# EAGLE board x9c (EAGLE 9.6.2)
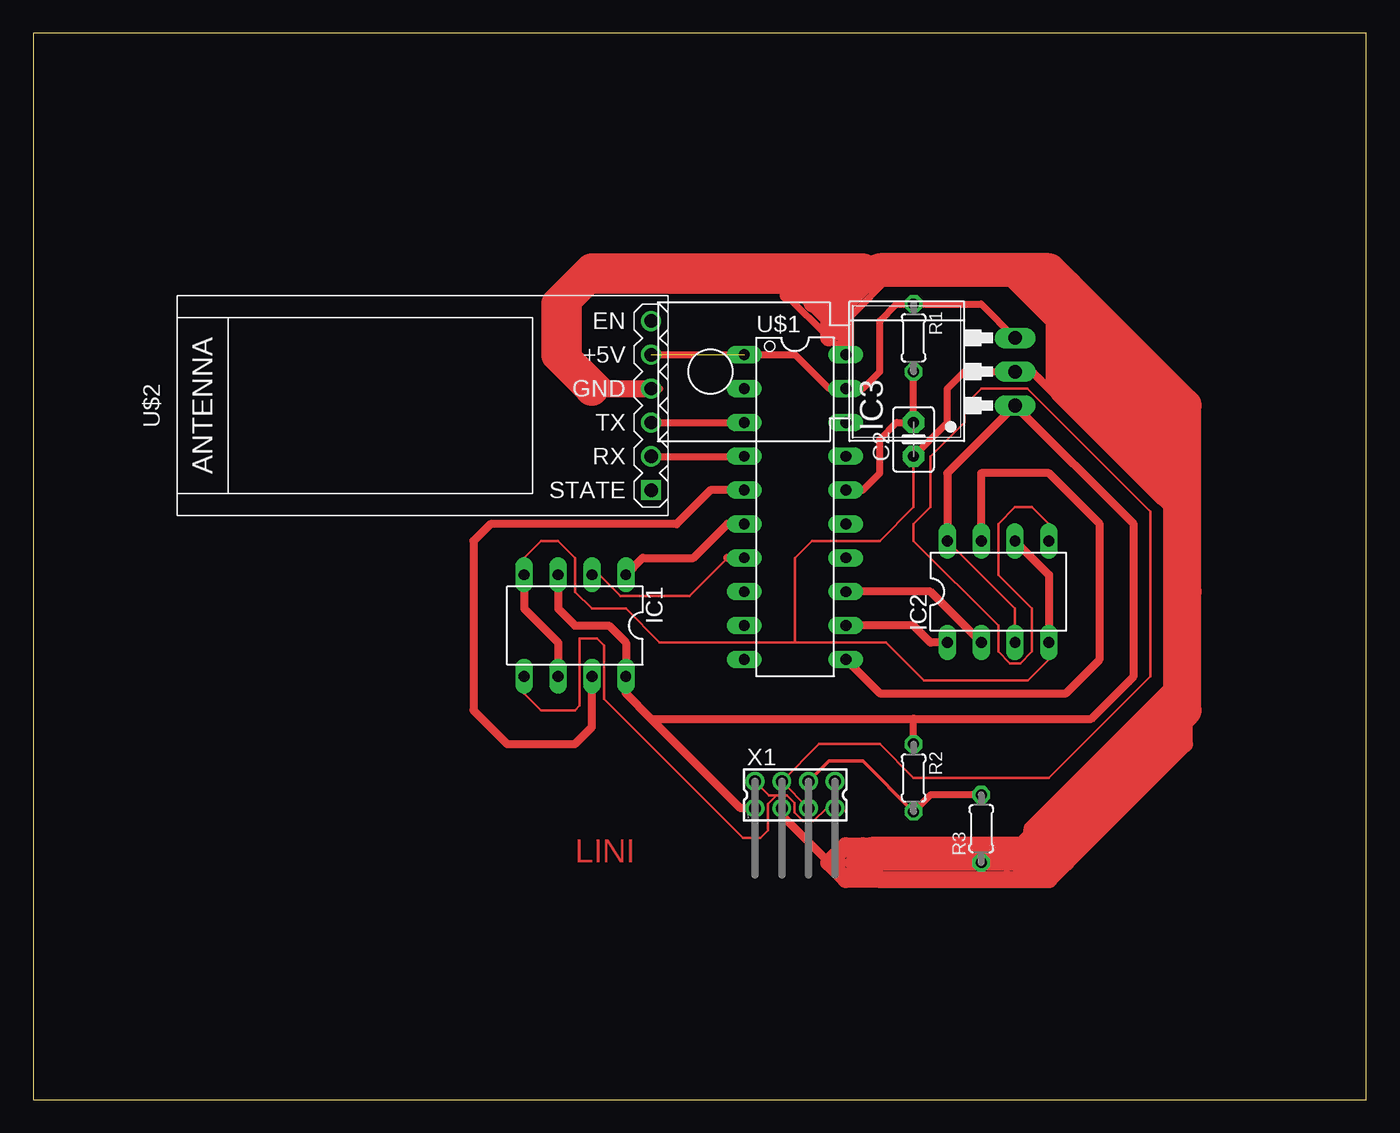
[diagram p0: board, top side]

Size 100 x 80 mm. Coordinates in mm from the lower left corner, seen from the top.
Outline: 0,0 100,0 100,80 0,80 0,0
Copper layers (1*16): Top 0.035mm / dielectric 1.5mm / Bottom 0.035mm
Design rules "default": minimum track width 6mil, minimum drill 0.35mm, track to track 6mil, track to pad 6mil, pad to pad 6mil, via to via 6mil, smd to smd 6mil, copper to edge 40mil, drill to drill 6mil, minimum pad ring 10mil, minimum via ring 8mil, stop-mask expansion 4mil, vias tented up to drill 0mil, thermal gap 10mil

## Footprints (pad centres in the part's own frame; a part is rotated, then mirrored left to right if it is on the bottom)
C2.5-3 = drill 0.813 pad 1.6 octagon: 1 -1.27,0; 2 1.27,0
DIL08 = drill 0.813 long: 1 -3.81,-3.81; 2 -1.27,-3.81; 3 1.27,-3.81; 4 3.81,-3.81; 5 3.81,3.81; 6 1.27,3.81; 7 -1.27,3.81; 8 -3.81,3.81
78MXXL = drill 1.016 long: GND 0,-5.08; IN -2.54,-5.08; OUT 2.54,-5.08 | hole 3.302: 0,17.78
0204/5 = drill 0.813 octagon: 1 -2.54,0; 2 2.54,0
N20 = drill 0.813 long: 1 -11.435,-3.81; 2 -8.895,-3.81; 3 -6.355,-3.81; 4 -3.815,-3.81; 5 -1.275,-3.81; 6 1.265,-3.81; 7 3.805,-3.81; 8 6.345,-3.81; 9 8.885,-3.81; 10 11.425,-3.81; 11 11.425,3.81; 12 8.885,3.81; 13 6.345,3.81; 14 3.805,3.81; 15 1.265,3.81; 16 -1.275,3.81; 17 -3.815,3.81; 18 -6.355,3.81; 19 -8.895,3.81; 20 -11.435,3.81
WIRELESS-BLUETOOTH-HC-05 = drill 1 square: 1 -6.35,-17.145 | drill 1: 2 -3.81,-17.145; 3 -1.27,-17.145; 4 1.27,-17.145; 5 3.81,-17.145; 6 6.35,-17.145
332-08 = drill 0.9 pad 1.27: 1 -3,-1; 2 -3,1; 3 -1,-1; 4 -1,1; 5 1,-1; 6 1,1; 7 3,-1; 8 3,1

## Placement (x,y rotation side)
C2  [C2.5-3]  66.04,49.53 90 top
IC1  X9C  [DIL08]  40.64,35.56 180 top
IC2  X9C  [DIL08]  72.39,38.1 0 top
IC3  [78MXXL]  68.58,54.61 90 top
R1  [0204/5]  66.04,57.15 270 top
R2  [0204/5]  66.04,24.13 270 top
R3  [0204/5]  71.12,20.32 90 top
U$1  G2XX3---N20  [N20]  57.15,44.45 270 top
U$2  WIRELESS-BLUETOOTH-HC-05  [WIRELESS-BLUETOOTH-HC-05]  29.21,52.07 90 top
X1  332-08  [332-08]  57.15,22.86 0 top

## Library data of the parts
C2 = capacitor-wima
IC1 IC2 = xicor-eepot
IC3 = v-reg
R1-R3 = rcl; SPICEPREFIX: R
U$1 = TI_MSP430_v16
U$2 = diy-modules
X1 = con-garry

## Nets
0: C2.1 IC1.4 IC1.6 IC2.4 IC2.6 IC3.GND R3.1 U$1.20 U$2.4 X1.3
N$1: U$1.4 U$2.2
N$2: IC3.OUT R1.1 U$1.1 U$1.19 U$2.5
N$3: U$1.3 U$2.3
N$4: IC1.7 U$1.5
N$5: IC1.1 U$1.6
N$6: IC1.2 U$1.7
N$7: C2.2 R1.2 U$1.16
N$8: IC2.7 U$1.11
N$9: IC2.1 U$1.12
N$10: IC2.2 U$1.13
N$13: IC1.5 X1.2 X1.7
N$14: IC2.5 X1.4 X1.5
N$16: R2.2 R3.2 X1.6
VCC: IC1.3 IC1.8 IC2.3 IC2.8 IC3.IN R2.1 X1.1

## Tracks (layer width: path | path; a pad name or v marks a point on that pad's centre or on a via)
0
  Top 0.203: 57.15,34.29 46.99,34.29 44.45,36.83 41.91,36.83 40.64,38.1 40.64,40.64 39.37,41.91 38.1,41.91 36.83,40.64 IC1.4 | 57.15,34.29 63.98,34.29 66.83,31.45 74.62,31.45 76.2,33.02 IC2.4 | 57.15,34.29 57.15,40.64 58.42,41.91 63.5,41.91 66.04,44.45 C2.1
  Top 0.508: 55.88,60.96 56.52,60.33 59.69,57.15 U$1.20 60.96,57.15 60.96,58.42 64.77,62.23 73.66,62.23 76.2,59.69 76.2,53.34 | 46.99,53.34 U$2.4 | C2.1 68.58,50.8 68.58,53.34 69.85,54.61 IC3.GND | R3.1 67.31,17.78
  Top 0.61: IC2.6 76.2,39.37 IC2.4 | IC1.4 36.83,36.83 39.37,34.29 IC1.6 | X1.3 56.15,21.32 59.69,17.78 62.23,17.78 63.5,17.78 67.31,17.78 72.39,17.78 73.03,18.41 85.09,30.48 85.09,44.45 76.2,53.34 74.93,54.61 IC3.GND 72.39,54.61
  Top 1.016: U$2.4 43.18,53.34 40.64,55.88 40.64,59.69 41.91,60.96 55.88,60.96 57.15,60.96 57.78,60.33 | 56.52,60.33 57.78,60.33 | 57.78,60.33 58.42,59.69 60.96,57.15
  Top 1.27: 59.69,57.15 59.69,58.42 | 59.69,58.42 59.69,60.96 57.15,60.96 | 58.42,59.69 60.96,62.23 | 63.5,62.23 62.23,62.23 60.96,62.23 | 64.77,62.23 63.5,62.23 | 59.69,58.42 63.5,62.23 | 60.96,62.23 41.91,62.23 | 41.91,53.34 U$2.4 | U$1.20 60.96,62.23 | 74.93,18.41 74.93,20.32 85.09,30.48 | 62.23,17.78 63.5,16.51 | 63.5,16.51 76.2,16.51 77.47,17.78 | 77.47,17.78 86.36,26.67 86.36,29.21 | 75.56,18.41 74.93,17.78 63.5,17.78 | 73.03,18.41 73.66,17.78 77.47,17.78 | 63.5,16.51 60.96,16.51 59.69,17.78 60.96,19.05 62.23,19.05
  Top 2.54: 73.66,62.23 76.2,62.23 77.47,60.96 | 73.66,62.23 63.5,62.23 | 77.47,60.96 77.47,54.61 | 77.47,54.61 85.09,46.99 | 85.09,53.34 80.64,57.78 77.47,60.96 | 85.09,52.07 85.09,53.34 | 85.09,48.26 85.09,49.53 78.11,56.52 78.74,57.15 | 85.09,52.07 83.82,52.07 78.74,57.15 | 62.23,62.23 41.91,62.23 39.37,59.69 39.37,55.88 41.91,53.34 | 77.47,54.61 77.47,53.34 85.09,45.72 85.09,46.99 | 85.09,46.99 85.09,52.07 | 78.74,57.15 73.66,62.23 | 85.09,53.34 86.36,52.07 86.36,38.1 86.36,29.21 85.09,27.94 75.56,18.41 74.93,18.41 73.03,18.41 62.87,18.41 62.23,17.78
N$1
  Top 0.508: U$2.2 U$1.4
N$2  (1 unrouted)
  Top 0.508: U$2.5 U$1.1 | U$1.1 57.15,55.88 59.69,53.34 U$1.19 62.23,53.34 63.5,54.61 63.5,58.42 64.77,59.69 R1.1 71.12,59.69 IC3.OUT 72.39,57.15
  Top 0.61: U$1.19
N$3
  Top 0.508: U$2.3 U$1.3
N$4
  Top 0.61: U$1.5 50.8,45.73 48.26,43.18 34.29,43.18 33.02,41.91 33.02,29.21 35.56,26.67 40.64,26.67 41.91,27.94 IC1.7
N$5
  Top 0.61: IC1.1 45.72,40.64 49.53,40.64 52.08,43.19 U$1.6
N$6
  Top 0.203: IC1.2 42.5,39.37 44.07,37.8 49.23,37.8 52.07,40.64
  Top 0.61: U$1.7 52.07,40.64
N$7
  Top 0.508: U$1.16 62.23,45.73 63.5,46.99 63.5,49.53 64.77,50.8 C2.2 R1.2
N$8
  Top 0.61: U$1.11 63.5,30.48 77.47,30.48 80.01,33.02 80.01,43.18 76.2,46.99 71.12,46.99 IC2.7
N$9
  Top 0.61: IC2.1 67.31,34.29 66.03,35.56 U$1.12
N$10
  Top 0.61: U$1.13 67.31,38.1 IC2.2
N$13
  Top 0.203: 55.75,22.82 56.55,22.82 57.11,22.26 57.11,21.55 57.75,20.9 58.55,20.9 59.51,21.86 X1.7 60.69,21.86 60.96,21.59 | 55.75,22.82 55.11,22.17 55.11,20.19 54.55,19.63 53.24,19.63 42.82,30.05 42.82,34.06 42.29,34.59 41,34.59 41,29.57 40.64,29.21 38.1,29.21 36.83,30.48 IC1.5 | X1.2 55.19,22.82 55.75,22.82
N$14
  Top 0.203: X1.5 X1.4 58.96,26.67 63.5,26.67 66.04,24.13 76.2,24.13 83.82,31.75 83.82,44.11 74.59,53.34 71.12,53.34 69.85,52.07 69.85,50.8 67.31,48.26 67.31,44.45 66.04,43.18 66.04,41.91 72.39,35.56 72.39,33.61 73.28,32.72 74.04,32.72 74.93,33.61 74.93,36.83 72.39,39.37 72.39,43.18 73.66,44.45 74.93,44.45 76.2,43.18 IC2.5
N$16
  Top 0.254: X1.6 59.69,25.4 62.23,25.4 R2.2
  Top 0.508: R2.2 67.31,22.86 R3.2
VCC
  Top 0.203: IC2.8 73.66,36.83 IC2.3
  Top 0.508: R2.1 66.04,28.57
  Top 0.61: IC1.3 39.37,36.83 40.64,35.56 43.18,35.56 44.45,34.29 IC1.8 44.45,30.48 46.35,28.57 | IC2.8 68.58,46.99 IC3.IN 82.55,43.18 82.55,31.75 79.38,28.57 66.04,28.57 46.35,28.57 | X1.1 53.07,21.86 46.35,28.57

## Text on the board
Top: LINI